# EAGLE board testBoard2 (EAGLE 8.6.0)

Size 27.99 x 27.93 mm. Coordinates in mm from the lower left corner, seen from the top.
Outline: 0,14.94 0,13.01 arc90 13.01,0 15.21,0 arc90 27.99,12.78 27.99,14.85 arc90 14.91,27.93 12.99,27.93 arc90 0,14.94
Copper layers (1*16): Top 0.035mm / dielectric 1.5mm / Bottom 0.035mm
Design rules "default": minimum track width 6mil, minimum drill 0.35mm, track to track 6mil, track to pad 6mil, pad to pad 6mil, via to via 6mil, smd to smd 6mil, copper to edge 40mil, drill to drill 6mil, minimum pad ring 10mil, minimum via ring 8mil, stop-mask expansion 4mil, vias tented up to drill 0mil, thermal gap 10mil

## Footprints (pad centres in the part's own frame; a part is rotated, then mirrored left to right if it is on the bottom)
CJV23 = smd 3.5 x 10.16 bottom: P$1 -7.62,0; P$2 7.62,0 | hole 2.54: 7.62,0; 7.62,1.27; 7.62,2.54; 7.62,-1.27; 7.62,-2.54; -7.62,0; -7.62,1.27; -7.62,2.54; -7.62,-1.27; -7.62,-2.54

## Placement (x,y rotation side)
U$1  CJV23-SOLENOID-VALVE  [CJV23]  13.97,13.97 0 top

## Library data of the parts
U$1 = programmable-air-components